# EAGLE board charlieplate (EAGLE 6.2)
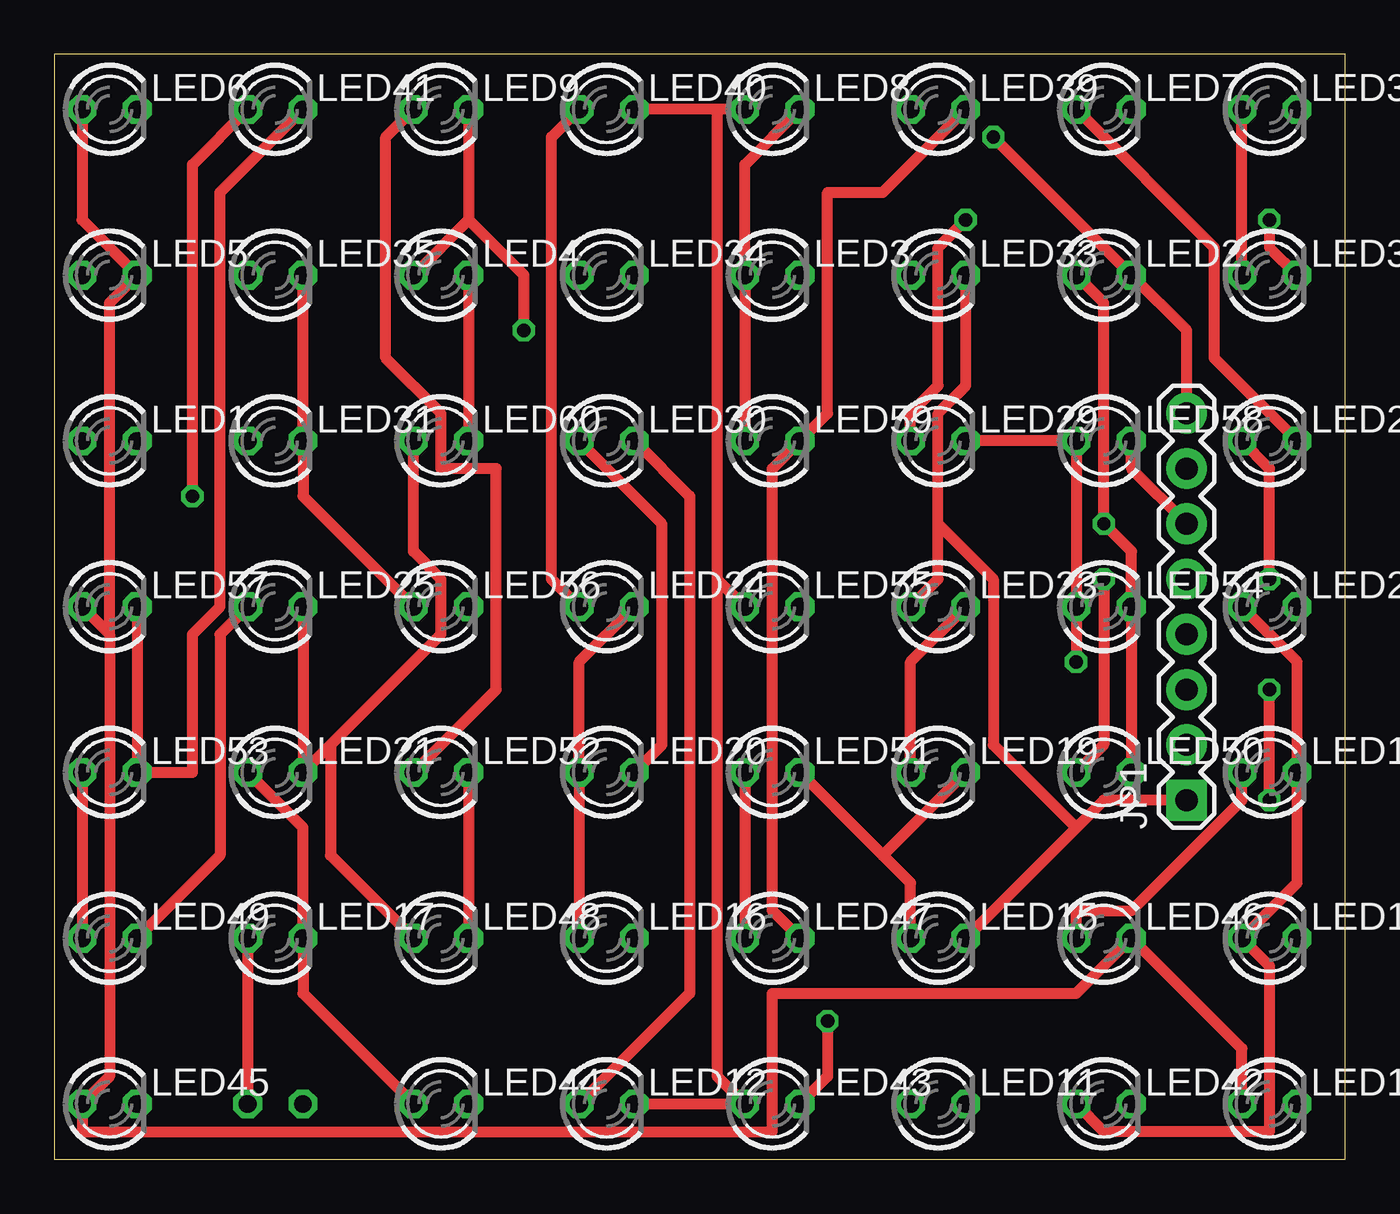
[diagram p0: board, top side]
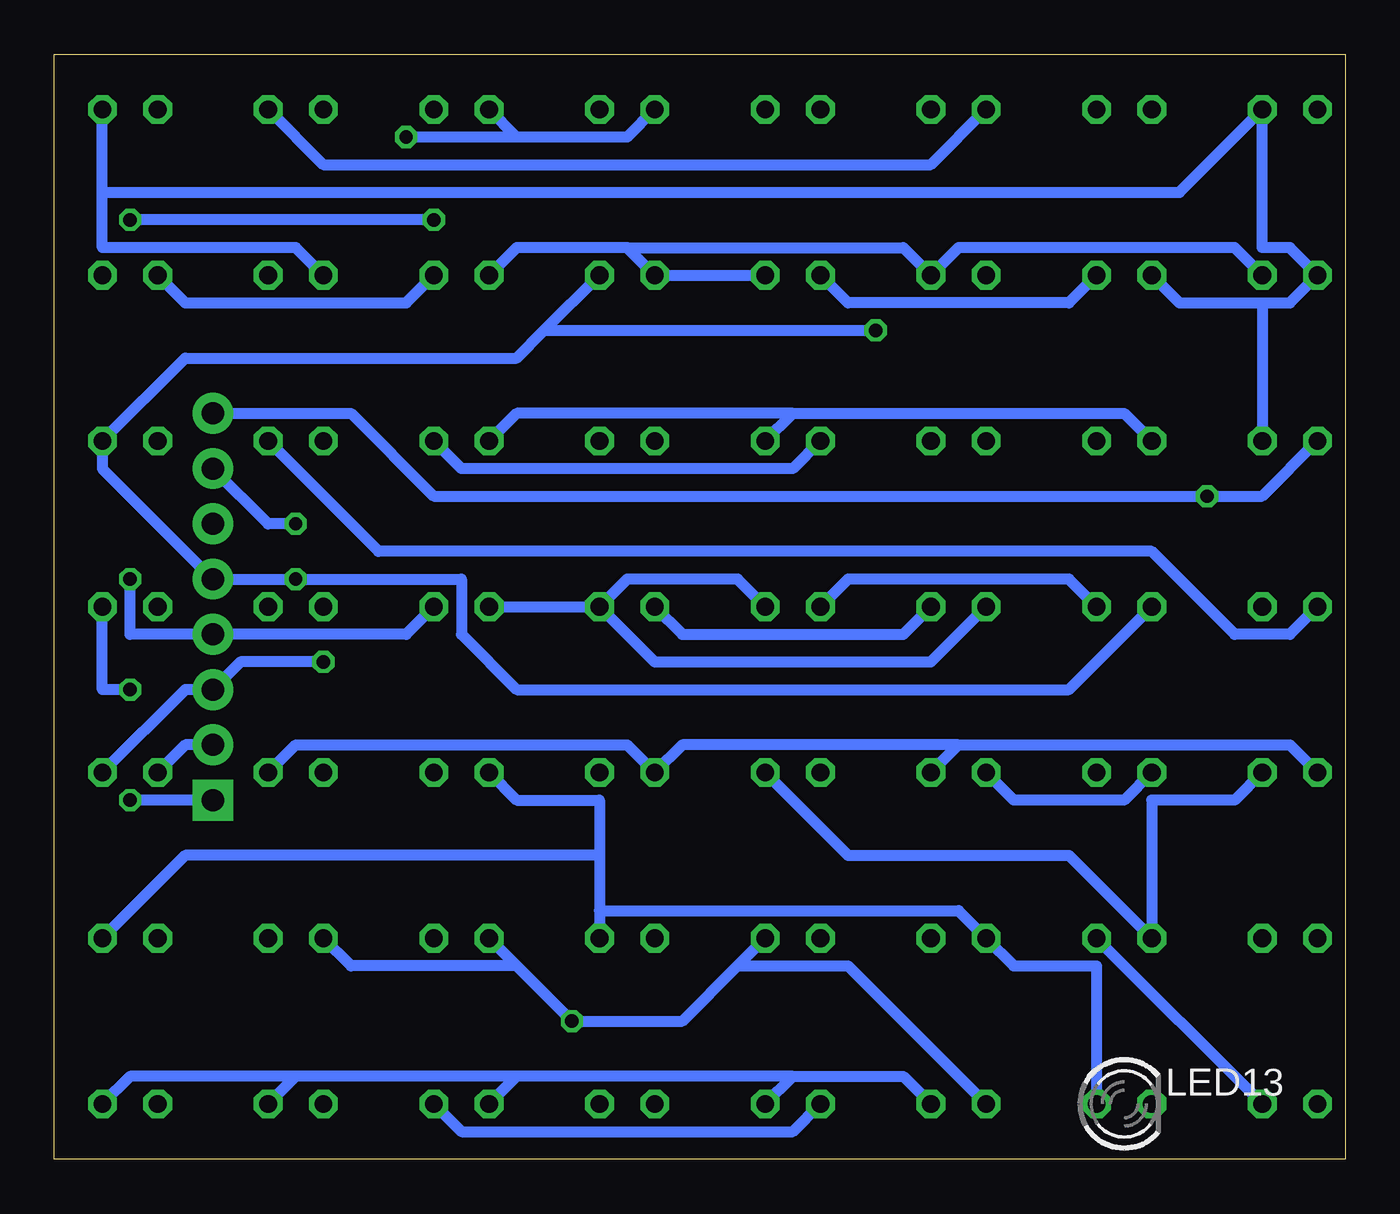
[diagram p1: board, bottom side, seen from below]

Size 59.36 x 50.79 mm. Coordinates in mm from the lower left corner, seen from the top.
Outline: 0,0 59.36,0 59.36,50.79 0,50.79 0,0
Copper layers (1*16): Top 0.035mm / dielectric 1.5mm / Bottom 0.035mm
Design rules: minimum track width 20mil, minimum drill 24mil, track to track 8mil, track to pad 8mil, pad to pad 8mil, via to via 8mil, smd to smd 8mil, copper to edge 40mil, drill to drill 8mil, minimum pad ring 10mil, minimum via ring 8mil, stop-mask expansion 4mil, vias tented up to drill 0mil, thermal gap 10mil

## Footprints (pad centres in the part's own frame; a part is rotated, then mirrored left to right if it is on the bottom)
1X08 = drill 1.016 pad 1.88 square: 1 0,0 | drill 1.016 pad 1.88: 2 2.54,0; 3 5.08,0; 4 7.62,0; 5 10.16,0; 6 12.7,0; 7 15.24,0; 8 17.78,0
LED3MM = drill 0.813 octagon: A -1.27,0; K 1.27,0

## Placement (x,y rotation side)
JP1  [1X08]  52.07,16.51 90 top
LED1  [LED3MM]  2.54,33.02 0 top
LED2  [LED3MM]  48.26,40.64 0 top
LED3  [LED3MM]  33.02,40.64 0 top
LED4  [LED3MM]  17.78,40.64 0 top
LED5  [LED3MM]  2.54,40.64 0 top
LED6  [LED3MM]  2.54,48.26 0 top
LED7  [LED3MM]  48.26,48.26 0 top
LED8  [LED3MM]  33.02,48.26 0 top
LED9  [LED3MM]  17.78,48.26 0 top
LED10  [LED3MM]  55.88,2.54 0 top
LED11  [LED3MM]  40.64,2.54 0 top
LED12  [LED3MM]  25.4,2.54 0 top
LED13  [LED3MM]  10.16,2.54 0 bottom
LED14  [LED3MM]  55.88,10.16 0 top
LED15  [LED3MM]  40.64,10.16 0 top
LED16  [LED3MM]  25.4,10.16 0 top
LED17  [LED3MM]  10.16,10.16 0 top
LED18  [LED3MM]  55.88,17.78 0 top
LED19  [LED3MM]  40.64,17.78 0 top
LED20  [LED3MM]  25.4,17.78 0 top
LED21  [LED3MM]  10.16,17.78 0 top
LED22  [LED3MM]  55.88,25.4 0 top
LED23  [LED3MM]  40.64,25.4 0 top
LED24  [LED3MM]  25.4,25.4 0 top
LED25  [LED3MM]  10.16,25.4 0 top
LED26  [LED3MM]  55.88,33.02 0 top
LED29  [LED3MM]  40.64,33.02 0 top
LED30  [LED3MM]  25.4,33.02 0 top
LED31  [LED3MM]  10.16,33.02 0 top
LED32  [LED3MM]  55.88,40.64 0 top
LED33  [LED3MM]  40.64,40.64 0 top
LED34  [LED3MM]  25.4,40.64 0 top
LED35  [LED3MM]  10.16,40.64 0 top
LED36  [LED3MM]  55.88,48.26 0 top
LED39  [LED3MM]  40.64,48.26 0 top
LED40  [LED3MM]  25.4,48.26 0 top
LED41  [LED3MM]  10.16,48.26 0 top
LED42  [LED3MM]  48.26,2.54 0 top
LED43  [LED3MM]  33.02,2.54 0 top
LED44  [LED3MM]  17.78,2.54 0 top
LED45  [LED3MM]  2.54,2.54 0 top
LED46  [LED3MM]  48.26,10.16 0 top
LED47  [LED3MM]  33.02,10.16 0 top
LED48  [LED3MM]  17.78,10.16 0 top
LED49  [LED3MM]  2.54,10.16 0 top
LED50  [LED3MM]  48.26,17.78 0 top
LED51  [LED3MM]  33.02,17.78 0 top
LED52  [LED3MM]  17.78,17.78 0 top
LED53  [LED3MM]  2.54,17.78 0 top
LED54  [LED3MM]  48.26,25.4 0 top
LED55  [LED3MM]  33.02,25.4 0 top
LED56  [LED3MM]  17.78,25.4 0 top
LED57  [LED3MM]  2.54,25.4 0 top
LED58  [LED3MM]  48.26,33.02 0 top
LED59  [LED3MM]  33.02,33.02 0 top
LED60  [LED3MM]  17.78,33.02 0 top

## Library data of the parts
JP1 = SparkFun
LED1-LED26 LED29-LED36 LED39-LED60 = 0-svo

## Nets
N$1: JP1.8 LED1.A LED2.K LED8.A LED10.K LED11.A LED12.K LED39.A LED40.K LED41.A LED42.K LED43.A LED44.K LED55.A LED56.K
N$3: LED11.K LED12.A LED29.A LED30.K LED31.A LED32.K
N$5: JP1.1 LED15.K LED16.A LED20.A LED22.K LED23.A LED24.K LED31.K LED32.A LED33.K LED34.A LED35.K LED36.A LED55.K LED56.A
N$9: JP1.3 LED13.K LED14.A LED17.A LED18.K LED20.K LED22.A LED29.K LED30.A LED41.K LED42.A LED53.K LED54.A LED57.K LED58.A
N$10: JP1.6 LED3.A LED4.K LED5.K LED6.A LED8.K LED10.A LED33.A LED34.K LED45.A LED46.K LED57.A LED58.K LED59.A LED60.K
N$11: JP1.4 LED13.A LED14.K LED19.A LED21.K LED23.K LED24.A LED25.K LED26.A LED39.K LED40.A LED47.K LED48.A LED59.K LED60.A
N$14: JP1.5 LED3.K LED4.A LED7.A LED9.K LED25.A LED26.K LED49.K LED50.A
N$15: JP1.7 LED1.K LED2.A LED5.A LED6.K LED35.A LED36.K LED47.A LED48.K LED49.A LED50.K LED51.A LED52.K LED53.A LED54.K
N$16: JP1.2 LED7.K LED9.A LED15.A LED16.K LED17.K LED18.A LED19.K LED21.A LED43.K LED44.A LED45.K LED46.A LED51.K LED52.A

## Tracks (layer width: path | path; a pad name or v marks a point on that pad's centre or on a via)
N$1  (via drill 0.61)
  Top 0.508: LED41.A 6.35,45.72 v6.35,30.48 | JP1.8 52.07,38.1 LED2.K v43.18,46.99 | LED12.K LED43.A 30.48,3.81 30.48,26.67 | LED8.A 30.48,48.26 | 30.48,48.26 LED40.K | 30.48,26.67 LED55.A | 30.48,48.26 30.48,26.67
  Bottom 0.508: LED1.A 3.81,30.48 v6.35,30.48 41.91,30.48 45.72,34.29 JP1.8 | LED44.K 20.32,3.81 25.4,3.81 | LED12.K 25.4,3.81 | 38.1,3.81 LED11.A | 25.4,3.81 38.1,3.81 | 48.26,3.81 LED42.K | 38.1,3.81 48.26,3.81 | LED10.K 55.88,3.81 48.26,3.81 | LED56.K 20.32,24.13 30.48,24.13 LED55.A | 38.1,46.99 LED39.A | 38.1,46.99 33.02,46.99 LED8.A | 38.1,46.99 v43.18,46.99
N$3  (via drill 0.61)
  Top 0.508: LED32.K 55.88,41.91 v55.88,43.18 | v41.91,43.18 40.64,41.91 40.64,35.56 39.37,34.29 LED29.A | LED12.A 29.21,7.62 29.21,30.48 LED30.K
  Bottom 0.508: LED12.A 25.4,1.27 40.64,1.27 LED11.K | LED31.A 10.16,34.29 25.4,34.29 | LED30.K 25.4,34.29 | LED29.A 38.1,34.29 25.4,34.29 | v41.91,43.18 v55.88,43.18
N$5  (via drill 0.61)
  Top 0.508: 46.99,15.24 48.26,16.51 JP1.1 | 46.99,15.24 LED15.K | v55.88,16.51 v55.88,21.59 | LED56.A 11.43,30.48 LED31.K LED35.K | LED32.A LED36.A | LED16.A LED20.A 24.13,22.86 LED24.K | LED33.K 41.91,35.56 40.64,34.29 40.64,29.21 | 40.64,29.21 40.64,26.67 LED23.A | 46.99,15.24 43.18,19.05 43.18,26.67 40.64,29.21
  Bottom 0.508: LED22.K 57.15,21.59 v55.88,21.59 | JP1.1 v55.88,16.51 | LED34.A 22.86,39.37 12.7,39.37 LED35.K | LED33.K 43.18,39.37 53.34,39.37 LED32.A | LED23.A LED55.K | LED55.K 33.02,26.67 27.94,26.67 LED24.K | LED56.A 19.05,22.86 31.75,22.86 LED55.K
N$9  (via drill 0.61)
  Top 0.508: LED17.A LED13.K | LED57.K LED53.K 6.35,17.78 6.35,24.13 7.62,25.4 7.62,44.45 LED41.K | LED22.A 57.15,22.86 LED18.K 57.15,12.7 LED14.A 55.88,8.89 55.88,1.27 48.26,1.27 LED42.A | LED29.K LED58.A LED54.A v46.99,22.86 | LED30.A 27.94,29.21 27.94,19.05 LED20.K
  Bottom 0.508: LED53.K 5.08,16.51 8.89,16.51 LED17.A 12.7,13.97 22.86,13.97 LED20.K | LED18.K 53.34,21.59 JP1.3 50.8,22.86 v46.99,22.86 | LED29.K 40.64,31.75 25.4,31.75 LED30.A
N$10
  Top 0.508: LED4.K LED60.K | LED59.A LED3.A 31.75,45.72 LED8.K | LED10.A 54.61,5.08 LED46.K 46.99,7.62 33.02,7.62 33.02,1.27 1.27,1.27 LED45.A 2.54,3.81 2.54,24.13 | LED6.A 1.27,43.18 LED5.K 2.54,39.37 2.54,24.13 | LED58.K 49.53,31.75 JP1.6 | LED57.A 2.54,24.13
  Bottom 0.508: LED34.K LED3.A 33.02,41.91 | LED33.A 38.1,41.91 33.02,41.91 | 33.02,41.91 20.32,41.91 LED4.K 17.78,41.91 5.08,41.91 LED5.K | LED58.K 44.45,27.94 8.89,27.94 5.08,24.13 2.54,24.13 LED57.A
N$11  (via drill 0.61)
  Top 0.508: LED25.K LED21.K 12.7,19.05 | LED60.A 16.51,27.94 17.78,26.67 17.78,24.13 12.7,19.05 | LED40.A 22.86,46.99 22.86,26.67 LED24.A | LED48.A 12.7,13.97 12.7,19.05 | LED26.A 55.88,31.75 v55.88,26.67 | LED23.K 39.37,22.86 LED19.A | LED47.K 33.02,11.43 33.02,31.75 LED59.K 35.56,34.29 35.56,44.45 38.1,44.45 LED39.K
  Bottom 0.508: LED13.A 11.43,8.89 15.24,8.89 LED48.A 17.78,11.43 34.29,11.43 | LED24.A 22.86,26.67 12.7,26.67 LED25.K | v55.88,26.67 55.88,24.13 JP1.4 43.18,24.13 LED23.K | 34.29,13.97 34.29,16.51 38.1,16.51 LED19.A | 34.29,13.97 34.29,11.43 | 34.29,11.43 LED47.K | LED14.K 53.34,13.97 34.29,13.97
N$14  (via drill 0.61)
  Top 0.508: LED49.K 7.62,13.97 7.62,24.13 LED25.A | LED50.A 48.26,19.05 v48.26,26.67 | 19.05,43.18 LED4.A | LED9.K 19.05,43.18 | LED7.A 53.34,41.91 53.34,36.83 LED26.K | 19.05,43.18 21.59,40.64 v21.59,38.1
  Bottom 0.508: 36.83,38.1 38.1,36.83 53.34,36.83 LED26.K 57.15,31.75 JP1.5 v48.26,26.67 40.64,26.67 40.64,24.13 38.1,21.59 12.7,21.59 LED25.A | 36.83,38.1 LED3.K | 36.83,38.1 v21.59,38.1
N$15  (via drill 0.61)
  Top 0.508: LED51.A LED47.A | LED53.A LED49.A | LED52.K LED48.K | LED50.K LED54.K 49.53,27.94 v48.26,29.21 48.26,39.37 LED2.A
  Bottom 0.508: LED53.A 2.54,19.05 17.78,19.05 | LED52.K 17.78,19.05 | 17.78,19.05 30.48,19.05 LED51.A 33.02,19.05 48.26,19.05 LED50.K | 3.81,39.37 7.62,39.37 LED35.A | 3.81,39.37 2.54,39.37 LED5.A 2.54,41.91 3.81,41.91 LED6.K 7.62,44.45 57.15,44.45 | 3.81,39.37 LED1.K | 57.15,44.45 57.15,41.91 48.26,41.91 LED2.A | 57.15,44.45 LED36.K | JP1.7 49.53,29.21 v48.26,29.21
N$16  (via drill 0.61)
  Top 0.508: LED44.A 11.43,7.62 LED17.K 11.43,15.24 LED21.A | LED43.K 35.56,3.81 v35.56,6.35 | 38.1,13.97 39.37,12.7 LED15.A | 38.1,13.97 LED51.K | 38.1,13.97 LED19.K | LED18.A 54.61,16.51 49.53,11.43 46.99,11.43 LED46.A | LED9.A 15.24,46.99 15.24,36.83 17.78,34.29 17.78,31.75 20.32,31.75 20.32,21.59 LED52.A
  Bottom 0.508: LED9.A 19.05,45.72 46.99,45.72 LED7.K | LED17.K LED45.K | LED52.A 15.24,16.51 10.16,16.51 LED21.A | LED18.A 53.34,19.05 JP1.2 | LED15.A 38.1,8.89 | 38.1,8.89 v35.56,6.35 30.48,6.35 27.94,8.89 | 27.94,8.89 LED16.K | LED46.A 45.72,8.89 38.1,8.89 | LED44.A 22.86,8.89 27.94,8.89